# Altium PCB reflex_brainboard_RevG.PcbDoc (part 2 of 2)
Units mil, origin at the board's own origin, x right, y up, seen from the top; angles counter-clockwise.
Board outline 1299.21 x 1692.91 mil, 4 copper layers (Top Layer, Ground pour, PowerPour, Bottom Layer), stack 61.2 mil thick; 127 components, 95 nets, 497 pads, 162 vias.
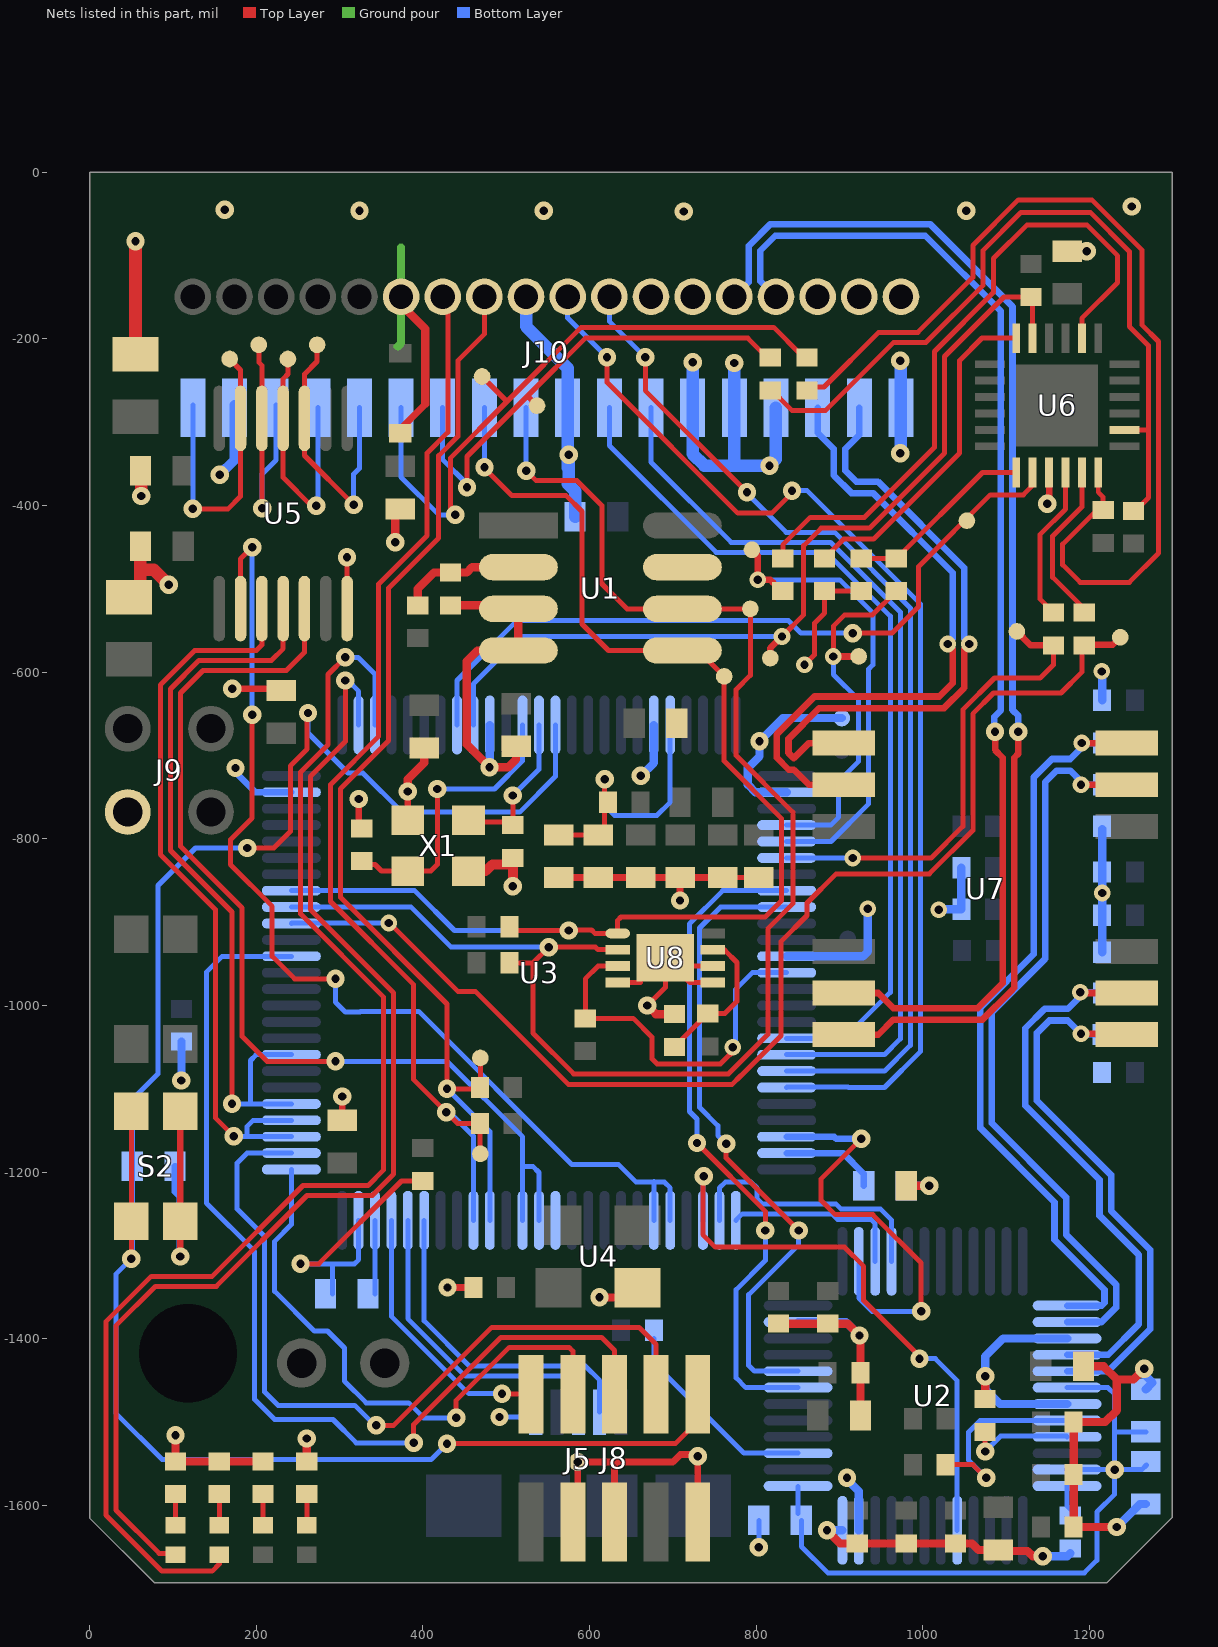
[diagram p4: the nets of this part, all layers, seen from the top]

## Via types
v1: diameter 22, hole 10, Top Layer to Bottom Layer, tented both sides, 139 vias
v2: diameter 20, hole 10, Top Layer to Bottom Layer, tented both sides, 23 vias

## Nets (pads, with @x,y where several pads share a name; then routed paths per layer and width w, separated by ;. In a path a pad name is that pad's centre, name@x,y a point inside that pad or via, vN(x,y) a via of type N, cw(c..) or ccw(c..) an arc to the next point about the centre after c; other vN are vias at no path point) (continued)
ETH_RMII_RXD0: U2.43 U3.33 | length 809.5
  Top Layer w6: v1(729,-1165) 811,-1247 v1(811,-1270)
  Bottom Layer w6: v1(729,-1165) 729,-1136.23 720,-1127.23 720,-902.03 759.82,-862.2 U3.33@836.61,-862.2 ; v1(811,-1270) 811,-1306 776,-1341 776,-1447 787.66,-1458.66 U2.43@850.39,-1458.66
ETH_RMII_RXD1: U2.44 U3.34 | length 776.4
  Top Layer w6: v1(764,-1166) 764,-1183 v1(851,-1270)
  Bottom Layer w6: v1(764,-1166) 754,-1156 754,-1144.25 732,-1122.25 732,-907 757.11,-881.89 U3.34@836.61,-881.89 ; U2.44@850.39,-1438.98 797.98,-1438.98 791,-1432 791,-1347 851,-1287 v1(851,-1270)
ETH_RMII_TX_EN: U2.2 U3.48 | length 518.8
  Top Layer w6: v1(926,-1160) 878,-1208 878,-1234 895,-1251 940,-1251 998,-1309 v1(998,-1367)
  Bottom Layer w6: U2.2@923.23,-1307.09 923.23,-1351.23 939,-1367 v1(998,-1367)
  Bottom Layer w8: U3.48@836.61,-1157.48 893.48,-1157.48 896,-1160 v1(926,-1160)
ETH_RMII_TXD0: U2.3 U3.51 | length 220.7
  Bottom Layer w6: U3.51@775.59,-1257.87 783.46,-1250 890.62,-1250 897.37,-1256.75 937.75,-1256.75 942.91,-1261.91 U2.3@942.91,-1307.09
ETH_RMII_TXD1: U2.4 U3.52 | length 324.4
  Bottom Layer w6: U3.52@755.91,-1257.87 755.91,-1219.09 763,-1212 794,-1212 801,-1219 801,-1232 807,-1238 895.59,-1238 901.59,-1244 949,-1244 962.6,-1257.6 U2.4@962.6,-1307.09
ETH_RX_N: J10.34 U7.9 | length 752.3
  Top Layer w7.87: U7.9@905,-685 863.46,-685 845.4,-703.06 845,-703.06 838.81,-696.87 838.81,-680 875.81,-643 1025.62,-643 1049.87,-618.75 1049.87,-572.06 v2(1055.94,-566)
  Bottom Layer w7.87: J10.34@923.82,-282.37 923.82,-315.18 907,-332 907,-358 920.13,-371.13 946.13,-371.13 1049.87,-474.87 1049.87,-559.94 v2(1055.94,-566)
ETH_RX_P: J10.32 U7.10 | length 776.3
  Top Layer w7.87: U7.10@905,-735 863.46,-735 845.4,-716.94 839.25,-716.94 824.94,-702.62 824.94,-674.25 870.06,-629.13 1019.87,-629.13 1036,-613 1036,-572.06 v2(1029.94,-566)
  Bottom Layer w7.87: J10.32@873.82,-282.37 873.82,-312.69 893.13,-332 893.13,-363.75 914.38,-385 940.38,-385 1036,-480.62 1036,-559.94 v2(1029.94,-566)
ETH_TX_N: J10.29 U7.15 | length 1421.5
  Top Layer w7.87: U7.15@905,-985 946.54,-985 964.6,-1003.06 1065.94,-1003.06 1096,-973 1096,-702.54 1086.75,-693.28 v1(1086.75,-671.32)
  Bottom Layer w7.87: J10.29@823.82,-149.29 805,-130.47 805,-94 823,-76 1003,-76 1093.81,-166.81 1093.81,-645.67 1086,-653.48 1086,-670.57 v1(1086.75,-671.32)
ETH_TX_P: J10.27 U7.16 | length 1487.4
  Top Layer w7.87: U7.16@905,-1035 946.54,-1035 964.6,-1016.94 1071.68,-1016.94 1105.81,-982.81 1109.87,-978.75 1109.87,-702.54 1114.75,-697.66 v1(1114.75,-671.32)
  Bottom Layer w7.87: J10.27@773.82,-149.29 791.13,-131.98 791.13,-88.25 817.25,-62.13 1008.75,-62.13 1107.68,-161.06 1107.68,-645.17 1114.75,-652.23 v1(1114.75,-671.32)
FAN_EN: U3.62
GND: C1.1 C2.1 C3.2 C4.1 C5.1 C6.1 C7.1 C8.1 C9.1 C10.1 C11.1 C12.1 C13.1 C14.1 C15.1 C16.1 C17.1 C18.1 C19.1 C20.1 C21.1 C22.1 C23.1 C24.1 C25.1 C26.1 C27.1 C28.1 C29.1 C31.1 C33.1 C34.1 C35.1 C36.1 C37.1 C38.1 C39.2 C40.2 C41.1 C42.1 C43.1 C44.1 C45.1 C46.2 C47.1 C48.1 C49.2 C50.2 D5.2 J5.5 J8.3 J8.5 J8.9 J9.2 J10.4 J10.11 J10.17 J10.20 J10.23 J10.25 J10.26 J10.28 J10.30 J10.31 J10.33 J10.35 J10.36 R4.1 R5.1 R6.1 R7.1 R9.1 R10.1 R11.1 R14.1 R29.1 R30.1 R31.1 R32.2 S2.2 S2.2_1 TP13.1 U1.3 U1.4 U1.7 U2.15 U2.19 U2.35 U2.36 U2.47 U3.10 U3.20 U3.27 U3.37 U3.74 U3.99 U4.2 U5.7 U6.3 U8.4 U8.5 U8.6 U8.9 X1.2 X1.4 | length 6711.4
  Top Layer w6: v1(253,-1310) 275,-1310 374.32,-1210.68 R14.1@400,-1210.68 ; v1(309,-462) 309.06,-462.06 U5.7@309.06,-523.62 ; U8.4@633.86,-972.44 661.42,-972.44 ; v1(669.29,-1000) 690.94,-978.35 U8.9@690.94,-942.91 U8.9@700.79,-952.76 ; U8.5@748.03,-972.44 720.47,-972.44 U8.9@700.79,-952.76 ; U8.6@748.03,-952.76 U8.9@700.79,-952.76 ; C10.1@759.84,-846.46 C45.1@803.15,-846.46 ; v2(858,-591) 870,-579 870,-541 882,-529 R31.1@882,-502.68 R32.2@926,-502.69
  Top Layer w7.87: v1(1149.6,-397.64) 1151.57,-399.61 U6.3@1151.57,-360.24
  Top Layer w8: v1@107,-1303 v1(108.76,-1301.24) S2.2@108.76,-1258.86 S2.2_1@108.76,-1126.97 ; v1@170,-621 v1(171,-620) 230,-620 C12.1@230,-622 ; v1@303,-1109 v1(303.15,-1109.15) C9.1@303.15,-1137.8 ; C39.2@322.83,-779.53 v1(322.83,-752.17) v1@324,-751 ; D5.2@373,-308 403,-278 ; X1.2@381.89,-777.56 v1(381.89,-743.11) ; v1(429.58,-1338.58) C36.1@462.6,-1338.58 ; C2.1@562.99,-846.46 C1.1@610.24,-846.46 C26.1@661.42,-846.46 C25.1@708.66,-846.46 ; J8.3@579.92,-1620.08 586,-1614 v1(586,-1548) 630,-1548 ; J8.5@629,-1619.16 J8.5@629.92,-1620.08 629.92,-1548.08 630,-1548 ; v1@709,-879 708.66,-878.66 v1(708.66,-874) C25.1@708.66,-846.46 ; J8.9@729.92,-1620.08 v1(729.92,-1540.92) 728,-1539 709,-1539 700,-1548 630,-1548 ; C10.1@759.84,-846.46 C25.1@708.66,-846.46
  Top Layer w10: v1(103.12,-1515.75) R4.1@103.12,-1547.24 R6.1@155.61,-1547.24 R7.1@208.11,-1547.24 ; R5.1@260.6,-1547.24 v1(260.6,-1519.68) ; v1(367,-444) C5.1@367,-398 ; J10.11@373.82,-149.29 373.82,-158.82 403,-188 403,-278 ; v1(381.89,-743.11) 381.89,-728.35 401.57,-708.66 C43.1@401.57,-690.94 ; R30.1@433.07,-519.68 510.43,-519.68 U1.3@514.63,-523.89 U1.4@514.63,-573.89 465.48,-573.89 452.76,-586.61 452.76,-686.76 v1(480,-714) 502.54,-714 511.81,-704.72 C11.1@511.81,-688.98 ; v1(612,-1350) 612.48,-1350.48 657.48,-1350.48 U4.2@657.48,-1338.58 ; v1(669.29,-1000) 679.61,-1010.31 R29.1@702,-1010.31 ; C23.1@826.77,-1381.89 909.89,-1381.89 v1(924,-1396) 925.2,-1397.2 C21.1@925.2,-1492.13 ; v1(885,-1630) 900.67,-1645.67 C19.1@921.26,-1645.67 C20.1@980.31,-1645.67 C18.1@1039.37,-1645.67 1059.06,-1645.67 1066.93,-1653.54 C17.1@1090.55,-1653.54 1090.55,-1654.7 1125.7,-1654.7 1132,-1661 v1(1144,-1661) ; C8.1@980.32,-1216.54 v1(1007.87,-1216.54) ; R9.1@1074.8,-1472.44 v1(1074.8,-1444.88) ; C14.1@1181.1,-1500 C16.1@1181.1,-1562.99 C15.1@1181.1,-1625.98 v1(1233,-1626) ; 1192.91,-1500 1219,-1500 1233,-1486 1233,-1449 ; C13.1@1192.91,-1433.07 1217.07,-1433.07 1233,-1449 ; v1(1266,-1436) 1253,-1449 1233,-1449
  Top Layer w12: X1.4@454.72,-838.58 475.42,-838.58 483.29,-830.71 507.87,-830.71 v1(507.87,-856.87)
  Top Layer w15: C50.2@47.24,-509.84 61.02,-496.06 61.02,-477 ; C46.2@61.02,-448.82 61.02,-477 ; C47.1@61.02,-358.27 62,-359.24 v1(62,-388.54) ; v1(95,-495) 77,-477 61.02,-477
  Top Layer w15.75: C49.2@55.12,-218.5 v1(55.12,-82.68)
  Top Layer w16: C41.1@1173.23,-94.49 v1(1196.85,-94.49)
  Ground pour w10: 370,-209 373.82,-205.18 J10.11@373.82,-149.29 373.82,-90.18
  Bottom Layer w6: v1(253,-1310) 292,-1310 ; C37.1@291.34,-1346.46 291.34,-1310.66 292,-1310 ; U3.74@322.83,-1257.87 322.83,-1305.17 318,-1310 292,-1310 ; v1@492,-1500 v1(492,-1494) 529.62,-1494 J5.5@535.43,-1488.19 ; C4.1@803.15,-1618.11 803.15,-1653.15 v1@805,-1655
  Bottom Layer w8: C35.1@102.36,-1192.91 102.36,-1223.36 108,-1229 108,-1300.48 v1(108.76,-1301.24) ; v1(175,-715) 175,-720 199.09,-744.09 U3.99@242.13,-744.09
  Bottom Layer w10: v1@110.24,-1089.76 R11.1@110.24,-1043.31 ; v1(480,-714) 480.32,-713.68 U3.10@480.31,-663.39 ; v1(661.42,-724.41) 677.17,-708.66 U3.20@677.16,-663.39 ; U3.37@836.61,-940.94 836.61,-941 928,-941 934,-935 v2(934,-884) ; U3.27@836.61,-744.09 799.09,-744.09 790,-735 790,-715 804,-701 v1(804,-683) 832,-655 TP13.1@902.89,-655 ; U2.47@850.39,-1379.92 907.92,-1379.92 v1(924,-1396) ; v1(885,-1630) 880.16,-1630 880.08,-1629.92 U2.36@903.54,-1629.92 ; v1@904,-1566 908,-1566 v1(909,-1567) 909,-1569 923.23,-1583.23 U2.35@923.23,-1629.92 ; C38.1@980.31,-1216.54 v1(1007.87,-1216.54) ; v2(1019,-885) 1019.67,-884.33 C29.1@1046.31,-884.33 C42.1@1046.31,-834.67 ; v1(1144,-1661) 1173.59,-1661 R10.1@1177,-1657.59 ; U2.19@1173.23,-1478.35 1092.52,-1478.35 1074.8,-1460.63 v1(1074.8,-1444.88) 1074.8,-1421.26 1096.46,-1399.61 U2.15@1173.23,-1399.61 ; v2(1215,-599) 1215.32,-599.31 C48.1@1215.31,-633.65 ; C27.1@1215.31,-936 C28.1@1215.31,-891.48 v2(1215.32,-865) C33.1@1215.31,-839.86 C34.1@1215.32,-788.24 ; v1(1233,-1626) 1260.57,-1598.43 C6.1@1267.72,-1598.43 ; v1@1266,-1434 v1(1266,-1436) 1266,-1443.17 1275.59,-1452.76 C3.2@1267.72,-1460.63
  Bottom Layer w12: v1@153,-363 v1(156,-363) 173.82,-345.18 J10.4@173.82,-279.33
  Bottom Layer w15: J10.17@523.82,-149.29 523.82,-184.82 573.82,-234.82 J10.20@573.82,-282.37 573.82,-354.82 575,-353.64 v1(575,-339) 575,-373 574,-374 582.68,-382.68 C44.1@582.68,-413.39 ; v1(724,-228) 723.82,-228.18 J10.26@723.82,-282.37 723.82,-337.82 738,-352 773,-352 ; v1(773.82,-228.82) J10.28@773.82,-282.37 773.82,-351.18 773,-352 ; J10.30@823.82,-282.37 823.82,-344.18 v1(816,-352) 773,-352 ; v1(973,-337) 973.82,-336.18 J10.36@973.82,-282.37 973.82,-226.82 v1(973,-226)
  other v1: 803.15,-1650.15 110,-1090 713,-47 324,-46 545,-46 1052,-46 162,-45 1251,-41
I2C1_SCL: J10.18 R16.1 TP9.1 U1.6 U3.92 U8.2 | length 1900.8
  Top Layer w6: R16.1@503.94,-948.82 532.18,-948.82 ; v1(524,-358) 536,-370 585,-370 615,-400 615,-494 644.89,-523.89 U1.6@711.48,-523.89 TP9.1@793,-523.89 793,-603.63 776,-620.63 776,-700 844,-768 844,-877.69 814,-907.69 814,-1034.87 766.87,-1082 581,-1082 532.18,-1033.18 532.18,-948.82 ; U8.2@633.86,-933.07 610.24,-933.07 607.17,-930 v1(551,-930) 532.18,-948.82
  Bottom Layer w6: U3.92@242.13,-881.89 385.89,-881.89 434,-930 v1(551,-930) ; J10.18@523.82,-282.37 523.82,-357.82 v1(524,-358)
I2C1_SDA: J10.16 R17.1 TP7.1 U1.5 U3.93 U8.1 | length 1545.9
  Top Layer w6: v1(474,-354) 474,-355 507,-388 572,-388 591,-407 591,-542 622.89,-573.89 U1.5@711.48,-573.89 730.52,-573.89 TP7.1@761.63,-605 761.63,-706.63 830.71,-775.71 830.71,-874.02 810.72,-894 785.21,-894 784.82,-893.61 768.25,-893.61 767.86,-894 700.38,-894 700.08,-893.7 637.8,-893.7 633.31,-898.19 U8.1@633.31,-910 ; R17.1@503.94,-905.51 508.43,-910 v1(575,-910) ; v1@575.55,-909.45 602.36,-909.45 606.3,-913.39 U8.1@633.86,-913.39
  Bottom Layer w6: U3.93@242.13,-862.2 390.2,-862.2 438,-910 v1(575,-910) ; J10.16@473.82,-282.37 474,-282.55 v1(474,-354)
I2C2_INT: R12.1 TP19.1 U3.9 U6.17 | length 1109.3
  Top Layer w6: v2(831,-557) 857,-531 857,-448 878,-427 936,-427 1026,-337 1026,-221 1097.39,-149.61 R12.1@1129.92,-149.61 1131.89,-151.57 U6.17@1131.89,-198.82
  Top Layer w8: TP19.1@817,-583 817,-571 v2(831,-557)
  Bottom Layer w6: U3.9@460.63,-663.39 460.63,-614.17 517.8,-557 v2(831,-557)
I2C2_SCL: R18.1 R37.2 U6.8 | length 945.1
  Top Layer w6: R37.2@815,-257.69 843.32,-286 883,-286 965,-204 1003.91,-204 1072,-135.91 1072,-94 1118,-48 1201.03,-48 1248,-94.97 1248,-185.01 1271,-208.01 1271,-309.06 ; U6.8@1242.13,-309.06 1271,-309.06 ; R18.1@1254.05,-407.37 1271,-390.42 1271,-309.06
I2C2_SCL_B: J10.14 R37.1 TP10.1 | length 592.8
  Top Layer w6: v1(453,-378) 453,-341 525.5,-268.5 ; TP10.1@537,-280 525.5,-268.5 ; R37.1@818,-218.31 809.32,-218.31 790,-199 595,-199 525.5,-268.5
  Bottom Layer w6: J10.14@423.82,-282.37 423.82,-344.82 453,-374 v1(453,-378)
I2C2_SDA: R19.1 R36.2 U6.6 | length 1189.7
  Top Layer w6: R36.2@862,-257.69 881.34,-257.69 947.03,-192 994,-192 1060,-126 1060,-87.75 1114.75,-33 1203,-33 1263,-93 1263,-183.04 1283,-203.04 1283,-457 1248,-492 1189,-492 1168,-471 1168,-446.17 R19.1@1208.66,-405.51 ; U6.6@1210.63,-360.24 1210.63,-383.86 1216.54,-389.76 R19.1@1216.54,-405.51
  Top Layer w8: R19.1@1208.66,-405.51 R19.1@1216.54,-405.51
I2C2_SDA_B: J10.12 R36.1 TP8.1 | length 787.7
  Top Layer w6: v1(439,-411) 433,-405 433,-343 501,-275 ; TP8.1@471,-245 501,-275 ; R36.1@862,-218.31 853.32,-218.31 821,-186 590,-186 501,-275
  Bottom Layer w6: J10.12@373.82,-282.37 373.82,-365.82 419,-411 v1(439,-411)
I2C3_SCL: J10.13 R20.1 TP4.1 U3.67 | length 1325.6
  Top Layer w6: J10.13@423.82,-149.29 430,-155.47 430,-312.03 405,-337.03 405,-435.97 347,-493.97 347,-676.91 289,-734.91 289,-875.09 389,-975.09 389,-1089 v1(428,-1128) 441.73,-1141.73 R20.1@468.5,-1141.73 468.5,-1177.5 TP4.1@469,-1178
  Bottom Layer w6: v1(428,-1128) 432,-1128 460.63,-1156.63 U3.67@460.63,-1257.87
I2C3_SDA: J10.15 R21.1 TP6.1 U3.66 | length 1330.2
  Top Layer w6: TP6.1@469,-1063 469,-1097.93 R21.1@468.5,-1098.43 466.93,-1100 v1(429,-1100) 429,-998.12 301,-870.12 301,-739.88 359,-681.88 359,-498.94 419,-438.94 419,-340 442,-317 442,-226 473.82,-194.18 J10.15@473.82,-149.29
  Bottom Layer w6: v1(429,-1100) 480.32,-1151.31 U3.66@480.31,-1257.87
I2C_EXT_R\E\S\E\T: TP18.1 U3.8 U6.2 | length 898.3
  Top Layer w6: v1(916,-553) 963,-553 995,-521 995,-473 1081.05,-386.95 1120.66,-386.95 1131.89,-375.72 U6.2@1131.89,-360.24
  Bottom Layer w6: U3.8@440.94,-663.39 440.94,-609.92 513.87,-537 514.87,-538 838.87,-538 853.87,-553 v1(916,-553)
LED0: D1.1 U3.2 | length 1437.4
  Top Layer w6: D1.1@101.15,-1657.48 83.43,-1657.48 31.5,-1605.54 31.5,-1384.47 78.97,-1337 151.97,-1337 260.97,-1228 339.25,-1228 365,-1202.25 365,-985.03 265,-885.03 265,-724.97 307,-682.97 v1(307,-610)
  Bottom Layer w6: v1@306,-607 307,-608 v1(307,-610) 310,-610 322.83,-622.83 U3.2@322.83,-663.39
LED1: D2.1 U3.3 | length 1603.6
  Top Layer w6: D2.1@155.61,-1659.45 155.61,-1670.39 147.09,-1678.91 86.91,-1678.91 19.5,-1611.5 19.5,-1379.5 74,-1325 147,-1325 256,-1216 334.28,-1216 353,-1197.28 353,-990 253,-890 253,-720 286,-687 286,-602.72 306.72,-582 v1(307,-582)
  Bottom Layer w6: v1(307,-582) 322,-582 342.52,-602.52 U3.3@342.52,-663.39
MCU_NRST: C35.2 J8.10 S2.1 S2.1_1 U3.14 | length 2381
  Top Layer w6: v1(50,-1304) 50.2,-1303.8 S2.1@50.2,-1258.86 S2.1_1@50.2,-1126.97 ; v1(189,-811) 221,-811 241,-791 241,-712.28 261,-692.28 261,-650 v1(262,-649) ; v1(429,-1526) 703,-1526 729.92,-1499.08 J8.10@729.92,-1466.54
  Bottom Layer w6: v1(189,-811) 127,-811 82,-856 82,-1082 51.18,-1112.82 C35.2@51.18,-1192.91 51.18,-1302.82 v1(50,-1304) 31.5,-1322.5 31.5,-1489.5 87,-1545 410,-1545 v1(429,-1526) ; v1(262,-649) 262,-672.84 310.16,-721 328,-721 375.03,-768.03 516.16,-768.03 559.06,-725.13 U3.14@559.05,-663.39
NetC1_2: C1.2 C2.2 R1.1 U3.21 | length 336.2
  Top Layer w6: C2.2@562.99,-795.28 618.11,-795.28 v1(618.11,-728.35)
  Bottom Layer w6: v1(618.11,-728.35) 618.11,-759.84 629.92,-771.65 681.1,-771.65 696.85,-755.91 U3.21@696.85,-663.39
NetC37_2: C37.2 U3.73 | length 88.6
  Bottom Layer w6: C37.2@342.52,-1346.46 U3.73@342.52,-1257.87
NetC38_2: C38.2 U3.49 | length 117.3
  Bottom Layer w8: U3.49@836.61,-1177.17 904.17,-1177.17 929.13,-1202.13 C38.2@929.13,-1216.54
NetD1_2: D1.2 R4.2 | length 37.4
  Top Layer w6: D1.2@103.12,-1624.02 R4.2@103.12,-1586.61
NetD2_2: D2.2 R6.2 | length 37.4
  Top Layer w6: D2.2@155.61,-1624.02 R6.2@155.61,-1586.61
NetD3_2: D3.2 R7.2 | length 37.4
  Top Layer w6: D3.2@208.1,-1624.02 R7.2@208.11,-1586.61
NetD4_2: D4.2 R5.2 | length 37.4
  Top Layer w6: D4.2@260.6,-1624.02 R5.2@260.6,-1586.61
NetR9_2: R9.2 U2.21 | length 124.1
  Top Layer w6: v1(1074.8,-1535.43) R9.2@1074.8,-1517.72
  Bottom Layer w6: v1(1074.8,-1535.43) 1093.32,-1516.91 1172.43,-1516.91 U2.21@1173.23,-1517.72
NetR10_2: R10.2 U2.24 | length 29.2
  Bottom Layer w6: U2.24@1173.23,-1576.77 1173.23,-1600.39 R10.2@1177.17,-1604.33
NetR13_1: R13.1 U2.39 | length 247.6
  Bottom Layer w6: R13.1@677.17,-1399.61 677.17,-1429.17 785.4,-1537.4 U2.39@850.39,-1537.4
NetR26_1: R26.1 U2.20 | length 233
  Top Layer w6: R26.1@1037.4,-1551.18 1060.18,-1551.18 v1(1076,-1567)
  Bottom Layer w6: v1(1076,-1567) 1054.8,-1545.8 1054.8,-1512.2 1068.97,-1498.03 U2.20@1173.23,-1498.03
NetR27_1: R27.1 R30.2 U1.2 | length 151.4
  Top Layer w10: R27.1@393.7,-519.69 393.7,-500 413.39,-480.31 R30.2@433.07,-480.31 452.76,-480.31 459.18,-473.89 U1.2@514.63,-473.89
NetR28_1: R28.1 R29.2 U8.7 | length 180
  Top Layer w6: R29.2@702,-1049.69 702,-1049.6 R28.1@742.01,-1009.59 762.41,-1009.59 777,-995 777,-948.28 762.32,-933.61 748.03,-933.61 U8.7@748.03,-933.07
NetR31_2: R31.2 U6.18 | length 404.8
  Top Layer w6: R31.2@882,-463.31 905.31,-440 941,-440 1044,-337 1044,-226 1071.18,-198.82 U6.18@1112.2,-198.82
OSC_IN: C39.1 U3.12 X1.3 | length 350.9
  Top Layer w6: C39.1@322.83,-830.71 342.52,-830.71 350.39,-838.58 X1.3@381.89,-838.58 409.45,-838.58 417.32,-830.71 v1(417.32,-740.16)
  Bottom Layer w6: v1(417.32,-740.16) 485.84,-740.16 519.69,-706.31 U3.12@519.68,-663.39
OSC_OUT: C40.1 U3.13 X1.1 | length 183.2
  Top Layer w6: X1.1@454.72,-777.56 456.69,-779.53 507.87,-779.53 v1(507.87,-748.03)
  Bottom Layer w6: v1(507.87,-748.03) 539.37,-716.54 U3.13@539.37,-663.39
PFB: C3.1 C4.2 C6.2 U2.18 U2.23 U2.37 | length 841.9
  Bottom Layer w6: C4.2@850,-1609.84 U2.37@850,-1577.17 ; C4.2@854.33,-1618.11 854.33,-1649.33 886,-1681 1194,-1681 1209,-1666 1209,-1608 1230.32,-1586.68 v1(1230.32,-1557.09) ; U2.23@1173.23,-1557.09 v1(1230.32,-1557.09) ; U2.18@1173.51,-1458.38 U2.18@1173.23,-1458.66 1222.44,-1458.66 1230.32,-1466.54 1230.32,-1511.81 ; C3.1@1267.72,-1511.81 1230.32,-1511.81 ; C6.2@1268.5,-1551.57 1262.99,-1557.09 v1(1230.32,-1557.09) ; v1(1230.32,-1557.09) 1230.32,-1511.81
PHY_RESET: U2.29 U3.53 | length 708.3
  Top Layer w6: v1(737,-1205) 736,-1205 736,-1275 751,-1290 905.97,-1290 929,-1313.03 929,-1354 996,-1421 v1(996,-1424)
  Bottom Layer w6: U3.53@736.22,-1257.87 736.22,-1204.78 736.44,-1205 v1(737,-1205) ; v1(996,-1424) 1015,-1424 1041.34,-1450.34 U2.29@1041.34,-1629.92
PHY_RX_N: R23.1 U2.13 U7.8 | length 921.4
  Top Layer w7.87: v2(1191,-685) U7.8@1245,-685
  Bottom Layer w7.87: U2.13@1173.23,-1360.24 1214.63,-1360.24 1218.13,-1356.74 1218.13,-1341.13 1158.13,-1281.13 1158.13,-1236.13 1069.13,-1147.13 1069.13,-1002.25 1133,-938.38 1133,-726.25 1155.13,-704.13 1177,-704.13 1191,-690.13 v2(1191,-685) R23.1@1215.31,-685
PHY_RX_P: R22.2 U2.14 U7.7 | length 923.3
  Top Layer w7.87: v2(1190,-735) U7.7@1245,-735
  Bottom Layer w7.87: U2.14@1173.23,-1379.92 1214.57,-1379.92 1232,-1362.49 1232,-1335 1172,-1275 1172,-1230.38 1083,-1141.38 1083,-1008 1146.87,-944.13 1146.87,-732 1160.87,-718 1177,-718 1190,-731 v2(1190,-735) R22.2@1215.31,-735
PHY_TX_N: R3.1 U2.16 U7.2 | length 682.6
  Top Layer w7.87: v2(1189,-984) 1190,-985 U7.2@1245,-985
  Bottom Layer w7.87: U2.16@1173.23,-1419.29 1222.51,-1419.29 1259,-1382.8 1259,-1299 1212.13,-1252.13 1212.13,-1209.13 1123.13,-1120.13 1123.13,-1027.25 1146.25,-1004.13 1174,-1004.13 1189,-989.13 v2(1189,-984) 1214.31,-984 R3.1@1215.31,-985
PHY_TX_P: R2.1 U2.17 U7.1 | length 678.2
  Top Layer w7.87: v2(1190,-1034) 1244,-1034 U7.1@1245,-1035
  Bottom Layer w7.87: U2.17@1173.23,-1438.98 1222.44,-1438.98 1272.87,-1388.54 1272.87,-1293.25 1226,-1246.38 1226,-1203.38 1137,-1114.38 1137,-1033 1152,-1018 1174,-1018 v2(1190,-1034) 1190.74,-1034.74 R2.1@1214.31,-1034.74
SPI1_MISO: R34.2 U6.4 | length 187.2
  Top Layer w6: R34.2@1157,-528.31 1141,-512.31 1141,-434.53 1171.26,-404.27 U6.4@1171.26,-360.24
SPI1_MISO_B: R34.1 TP16.1 U3.31 | length 572.8
  Top Layer w6: v2(916,-823) 1010,-823 1048,-785 1048,-645 1086,-607 1141,-607 1157,-591 R34.1@1157,-567.68
  Top Layer w8: TP16.1@1113,-551 1129.68,-567.68 R34.1@1157,-567.68
  Bottom Layer w6: U3.31@836.61,-822.83 915.83,-822.83 v2(916,-823)
SPI1_MOSI: R35.2 U6.5 | length 200.6
  Top Layer w6: U6.5@1190.94,-360.24 1190.94,-401.55 1156,-436.5 1156,-486 R35.2@1198.66,-528.66
SPI1_MOSI_B: R35.1 TP17.1 U3.91 | length 1475.6
  Top Layer w6: v2(359,-901) 359,-900 442,-983 463,-983 575,-1095 770.84,-1095 781.84,-1084 782,-1084 830,-1036 830,-923.03 861,-892.03 861,-877 896,-842 1007.97,-842 1060,-789.97 1060,-649.97 1084.97,-625 1166,-625 1191,-600 1191,-575.68 R35.1@1199,-567.68
  Top Layer w8: R35.1@1194,-567.68 1199,-567.68 1199.68,-567 1228,-567 TP17.1@1237,-558
  Bottom Layer w6: U3.91@242.13,-901.57 242.7,-901 v2(359,-901)
SPI1_NSS: R32.1 R33.2 U6.1 | length 228.9
  Top Layer w6: R32.1@926,-463.31 968.68,-463.31 1071.76,-360.24 U6.1@1112.2,-360.24
SPI1_NSS_B: R33.1 TP14.1 U3.29 | length 441.3
  Top Layer w6: v2(892.63,-581) 892.63,-544.63 906.27,-531 939.68,-531 R33.1@968,-502.68
  Top Layer w8: v2(892.63,-581) TP14.1@923,-581
  Bottom Layer w6: U3.29@836.61,-783.46 889.54,-783.46 899,-774 899,-731 923,-707 923,-633 892.63,-602.63 v2(892.63,-581)
SPI1_SCLK: R38.2 U6.14 | length 800.5
  Top Layer w6: R38.2@832,-463.31 832,-447 865,-414 930,-414 1014,-330 1014,-215 1085,-144 1085,-103.25 1125.25,-63 1196.86,-63 1234,-100.14 1234,-132.14 1190.94,-175.2 U6.14@1190.94,-198.82
SPI1_SCLK_B: R38.1 TP15.1 U3.30 | length 562.4
  Top Layer w8: TP15.1@795,-453 802,-460 v2(802,-489) 817,-489 R38.1@821,-493
  Bottom Layer w6: v2(802,-489) 900.28,-489 940,-528.72 940,-591 935,-596 935,-758 889.85,-803.15 U3.30@836.61,-803.15
SPI4_MISO: J10.21 U3.44 | length 1243.4
  Top Layer w6: v1(667,-222) 667,-262 v1(789,-384)
  Bottom Layer w6: J10.21@623.82,-149.29 623.82,-178.82 v1(667,-222) ; v1(789,-384) 789,-385 836,-432 894.2,-432 985,-522.8 985,-1047.74 954,-1078.74 U3.44@836.61,-1078.74
SPI4_MOSI: J10.19 U3.45 | length 1348.9
  Top Layer w6: v1(621,-222) 621,-252 778,-409 818.58,-409 843.78,-383.8 843,-383.03 v1(843,-382)
  Bottom Layer w6: J10.19@573.82,-149.29 573.82,-174.82 v1(621,-222) ; U3.45@836.61,-1098.43 836.93,-1098.11 910.39,-1098.11 910.71,-1098.43 954,-1098.43 997,-1055.43 997,-517.83 864.16,-385 861.16,-382 v1(843,-382)
SPI4_NSS: J10.22 U3.42 | length 1066.8
  Bottom Layer w6: J10.22@623.82,-282.37 623.82,-327.82 752,-456 884.25,-456 961,-532.75 961,-984.28 905.28,-1040 888.72,-1040 888.09,-1039.37 U3.42@836.61,-1039.37
SPI4_SCLK: J10.24 U3.43 | length 1095.7
  Bottom Layer w6: J10.24@673.82,-282.37 673.82,-347.82 770,-444 889.23,-444 973,-527.77 973,-1040.06 954,-1059.06 U3.43@836.61,-1059.06
TCLK: J8.4 U3.76 | length 699.7
  Top Layer w6: v1(440,-1495) 440,-1474 503.71,-1410.29 575.29,-1410.29 579.92,-1414.92 J8.4@579.92,-1466.54
  Bottom Layer w6: U3.76@242.13,-1196.85 242.13,-1262.87 222,-1283 222,-1343 269.61,-1390.61 285.61,-1390.61 306,-1411 306,-1451 332,-1477 383,-1477 401,-1495 v1(440,-1495)
TDI: J8.8 U3.77 | length 962.1
  Top Layer w6: v1(344,-1504) 365,-1504 482.71,-1386.29 659.29,-1386.29 679.92,-1406.92 J8.8@679.92,-1466.54
  Bottom Layer w6: U3.77@242.13,-1177.17 188.83,-1177.17 177,-1189 177,-1244.31 210,-1277.31 210,-1464 226,-1480 318.03,-1480 342.03,-1504 v1(344,-1504)
TDO: J8.6 U3.89 | length 1224.9
  Top Layer w6: v1(389,-1525) 389,-1503.03 493.74,-1398.29 614.29,-1398.29 629.92,-1413.92 J8.6@629.92,-1466.54
  Bottom Layer w6: U3.89@242.13,-940.94 159.06,-940.94 140,-960 140,-1237 198,-1295 198,-1473 222,-1497 292,-1497 320,-1525 v1(389,-1525)
TEMPALERT: R15.1 U3.38 U8.3 | length 468
  Top Layer w6: U8.3@633.86,-952.76 610.24,-952.76 595,-967.99 R15.1@595,-1015.46 652.46,-1015.46 675,-1038 675,-1064 681,-1070 757.32,-1070 777,-1050.32 776.68,-1050 v2(772,-1050)
  Bottom Layer w6: v2(772,-1050) 774,-1050 776,-1048 775,-1047 775,-981 795.37,-960.63 U3.38@836.61,-960.63
TMS: J8.2 U3.72 | length 321.4
  Top Layer w6: v1@495,-1466.54 J8.2@529.92,-1466.54
  Bottom Layer w6: U3.72@362.2,-1257.87 362.2,-1373.15 455.06,-1466 v1(495,-1466)
UART3_DATA_A: U3.55 U3.56 U5.2 | length 1287.9
  Top Layer w6: U5.2@181.1,-523.62 181.1,-463.9 v1(195,-450) ; v1(195,-651) 195,-775 169,-801 169,-831 219,-881 219,-941 246,-968 v1(295,-968)
  Bottom Layer w6: v1@195,-641 v1(195,-450) ; v1(295,-968) 295,-996 307,-1008 324.28,-1008 325.28,-1007 395,-1007 579,-1191 635,-1191 656,-1212 690,-1212 696.85,-1218.85 U3.55@696.85,-1257.87 ; U3.56@677.16,-1257.87 677.17,-1211
UART3_DATA_B: J10.2 TP1.1 U5.13 | length 358.3
  Top Layer w6: v1(123.82,-403.82) 166.18,-403.82 181.1,-388.9 U5.13@181.1,-295.28 181.1,-237.1 TP1.1@168,-224
  Bottom Layer w6: v1(123.82,-403.82) J10.2@123.82,-279.33
UART4_DATA_A: U3.78 U3.79 U5.3 | length 901.5
  Top Layer w6: v1(173,-1157) 150.89,-1134.89 150.89,-884.8 85,-818.91 85,-615.06 126.06,-574 200,-574 206.69,-567.31 U5.3@206.69,-523.62
  Bottom Layer w6: v1(173,-1157) 173.48,-1157.48 189,-1157.48 ; U3.78@242.13,-1157.48 189,-1157.48 ; U3.79@242.13,-1137.8 196.2,-1137.8 189,-1145 189,-1157.48
UART4_DATA_B: J10.6 TP2.1 U5.12 | length 328.3
  Top Layer w6: TP2.1@203,-207 203,-228 206.69,-231.69 U5.12@206.69,-295.28 206.69,-402.69 v1(207,-403)
  Bottom Layer w6: v1(207,-403) 207,-362 223.82,-345.18 J10.6@223.82,-279.33
UART5_DATA_A: U3.80 U3.83 U5.4 | length 908.7
  Top Layer w6: v1(170.89,-1118.11) 170.89,-887.83 97,-813.94 97,-620.03 131.03,-586 218,-586 232.28,-571.72 U5.4@232.28,-523.62
  Bottom Layer w6: v1@170,-1119 v1(170.89,-1118.11) 193,-1118.11 ; U3.80@242.13,-1118.11 193,-1118.11 ; U3.83@242.13,-1059.06 199.94,-1059.06 193,-1066 193,-1118.11
UART5_DATA_B: J10.8 TP3.1 U5.11 | length 314.1
  Top Layer w6: TP3.1@238,-224 238,-242 232.28,-247.72 U5.11@232.28,-295.28 232.28,-366.28 266,-400 v1(272,-400)
  Bottom Layer w6: v1@273.82,-398.18 J10.8@273.82,-282.37
UART6_DATA_A: U3.63 U3.64 U5.5 | length 1231.4
  Top Layer w6: U5.5@257.87,-523.62 257.87,-576.13 236,-598 136,-598 109,-625 109,-808.97 182.89,-882.86 182.89,-1037 212.89,-1067 v1(295,-1067)
  Bottom Layer w6: v1(295,-1067) 429,-1067 519.69,-1157.69 519.69,-1193 ; U3.64@519.68,-1257.87 519.69,-1193 ; U3.63@539.37,-1257.87 539.37,-1200.37 532,-1193 519.69,-1193
UART6_DATA_B: J10.10 TP5.1 U5.10 | length 342.2
  Top Layer w6: TP5.1@273,-207 273,-227 257.87,-242.13 U5.10@257.87,-295.28 257.87,-339.87 v1(317,-399)
  Bottom Layer w6: v1(317,-399) 317,-362 323.82,-355.18 J10.10@323.82,-282.37
USB_DM: J5.2 U3.70 | length 399.1
  Bottom Layer w6: U3.70@401.57,-1257.87 401.57,-1378.57 456,-1433 595.2,-1433 612.2,-1450 J5.2@612.2,-1488.19
USB_DP: J5.3 U3.71 | length 386.3
  Bottom Layer w6: U3.71@381.89,-1257.87 381.89,-1375.86 451.03,-1445 572.61,-1445 586.61,-1459 J5.3@586.61,-1488.19
pads on no net: J5.1 J5.4 J5.TAB J5.TAB_1 J5.TAB_2 J5.TAB_3 J8.7 U1.1 U2.1 U2.5 U2.6 U2.7 U2.8 U2.9 U2.10 U2.11 U2.12 U2.25 U2.26 U2.27 U2.28 U2.33 U2.38 U2.41 U2.42 U2.45 U2.46 U3.1 U3.4 U3.5 U3.7 U3.15 U3.17 U3.18 U3.23 U3.39 U3.40 U3.41 U3.54 U3.58 U3.60 U3.61 U3.65 U3.68 U3.81 U3.82 U3.84 U3.85 U3.86 U3.87 U3.88 U3.90 U3.95 U3.96 U5.6 U5.9 U6.7 U6.9 U6.10 U6.11 U6.12 U6.13 U6.16 U6.19 U6.20 U6.21 U6.22 U6.23 U6.24 U6.25

## Polygon pours and split planes (outlines as drawn)
3V3 on PowerPour "Sig1Pwr" (solid, shelved, pour order 29): 5,-5 -5,-15 -5,-1695 1300,-1695 1295,-1690 1295,0
GND on Ground pour "Top Layer-No Net" (solid, shelved, pour order 33): 0,-1615 77.91,-1692.91 1221.09,-1692.91 1299.21,-1614.79 1299.21,0 0,0
GND on Top Layer "GND" (solid, remove dead copper, shelved, pour order 27): 0,0 0,-1692.91 1299.21,-1692.91 1299.21,0
GND on Bottom Layer "GND" (solid, remove dead copper, shelved, pour order 25): 0,0 0,-1692.91 1299.21,-1692.91 1299.21,0

## Keep-outs
Keep-Out Layer:
  the board outline again, w5
  text "Keepout" at -680.07,-1293.92 h60

## Other copper
Top Layer:
  pour cut-out: 78.97,-116.91 78.97,-196.91 1011,-196.91 1013.97,-193.94 1013.97,-116.91
  text "Top Layer" at -745.05,-477.25 h60
PowerPour:
  text "Sig2(L3,Pos)" at -815.02,-683.5 h60
Ground pour:
  text "Sig1(L2,Pos)" at -817.02,-585.5 h60
Bottom Layer:
  pour cut-out: 78.5,-101 78.5,-191 1013.5,-191 1013.5,-136 988.5,-111 763.5,-111 753.5,-101
  pour cut-out: 84,-226 84,-346 1014,-346 1014,-226
  text "Bot Layer" at -740.05,-783.5 h60
Multi-Layer:
  text "Multilayer" at -755.04,-1396 h60

## Silkscreen, mask and mechanical layers (free items; w line width, h text height)
Top Overlay:
  rectangle: 787,-831 817,-812
  rectangle: 744,-830 774,-811
  rectangle: 693,-830 723,-811
  rectangle: 646,-831 676,-812
  rectangle: 548,-830 578,-811
  rectangle: 595,-830 625,-811
  lines w8: 519,-771 539,-751 539,-733
  lines w10: 103,-1675 110,-1682 282,-1682 ; 248,-1605 373,-1605 382,-1614 ; 282,-1619 296,-1605 ; 774,-864 787,-877 787,-879 ; 868,-1624 868,-1659 885,-1676 1084,-1676 1087,-1673
  text "b" at 1005,-192 h250 r180
  text "B5" at 245,-207 h25 r90
  text "B3" at 171,-208 h25 r90
  text "B6" at 308,-218 h25 r90
  text "B4" at 212,-248 h25 r90
  text "Top Overlay" at -805.03,-273.08 h60
  text "SCL2" at 616,-300 h40 r180
  text "SDA2" at 502,-302 h40 r180
  text "SCL1" at 859,-548 h40 r180
  text "SDA1" at 864,-594 h40 r180
  text "TX" at 146,-608 h40 r180
  text "RX" at 65,-703 h40 r180
  text "IO" at 213,-756 h40 r180
  text "GND" at 86,-804 h40 r180
  text "BOOT" at 173.23,-1027.56 h40 r90
  text "SDA3" at 451,-1048 h40 r180
  text "SCL3" at 569,-1167 h40 r180
  text "RESET" at 167,-1259 h40 r90
  text "AUX4" at 293,-1367 h40 r180
  text "AUX3" at 399,-1367 h40 r180
  text "RHR REFLEX REV G" at 45,-1630 h40 r90
Bottom Overlay:
  lines w6: 25,-1565 175,-1565 ; 35,-1665 35,-1635 ; 35,-1625 35,-1595 ; 45,-1670 75,-1670 ; 45,-1630 75,-1630 ; 45,-1590 75,-1590 ; 85,-1665 85,-1635 ; 85,-1625 85,-1595 ; 110,-1665 110,-1635 ; 110,-1625 110,-1595 ; 120,-1670 150,-1670 ; 120,-1630 150,-1630 ; 120,-1590 150,-1590 ; 160,-1665 160,-1635 ; 160,-1625 160,-1595
  lines w10: 58,-415 58,-206 95,-169 ; 1001,-283 1150,-283 1206,-339 1206,-356
  text "U3 / GND / U4 / U5 / U6 / I2SD / I2SC / I1SD / I1SC / GND / S4CS / S4SC / GND / GND / GND / ERXN / ERXP / GND" at 1218,-366 h35 r90
  text "5V / 3V3 / 3V3 / 3V3 / 3V3 / GND / I3SC / I3SD / GND / S4MO / S4MI / GND / GND / ETXP / ETXN / GND / GND / GND" at 551,-425 h35 r90
  text "GND" at 923,-644 h40 r180
  text "ANA1" at 923,-685 h40 r180
  text "ANA0" at 899,-937 h40 r180
  text "Bot Overlay" at -800.03,-987.67 h60
Top Paste:
  text "Top Paste" at -745.05,-171 h60
Bottom Paste:
  text "Bot Paste" at -740.05,-1109.74 h60
Top Solder:
  text "Top Solder" at -770.04,-375.17 h60
Bottom Solder:
  text "Bot Solder" at -765.04,-905.58 h60
Mechanical 2:
  the board outline again, w5
  text "Outline" at -675.07,-1211.83 h60
Mechanical 3:
  text "Dimensions" at -778,-1488 h60

## Dimensions
1300.21,-1692.91 to 1299.21,0 on Mechanical 3
0,-1692.91 to 1300.21,-1692.91 on Mechanical 3
1300.21,-1692.91 to 1299.21,0 on Mechanical 3
0,-1692.91 to 1300.21,-1692.91 on Mechanical 3